# EAGLE board Panel (EAGLE 6.2)
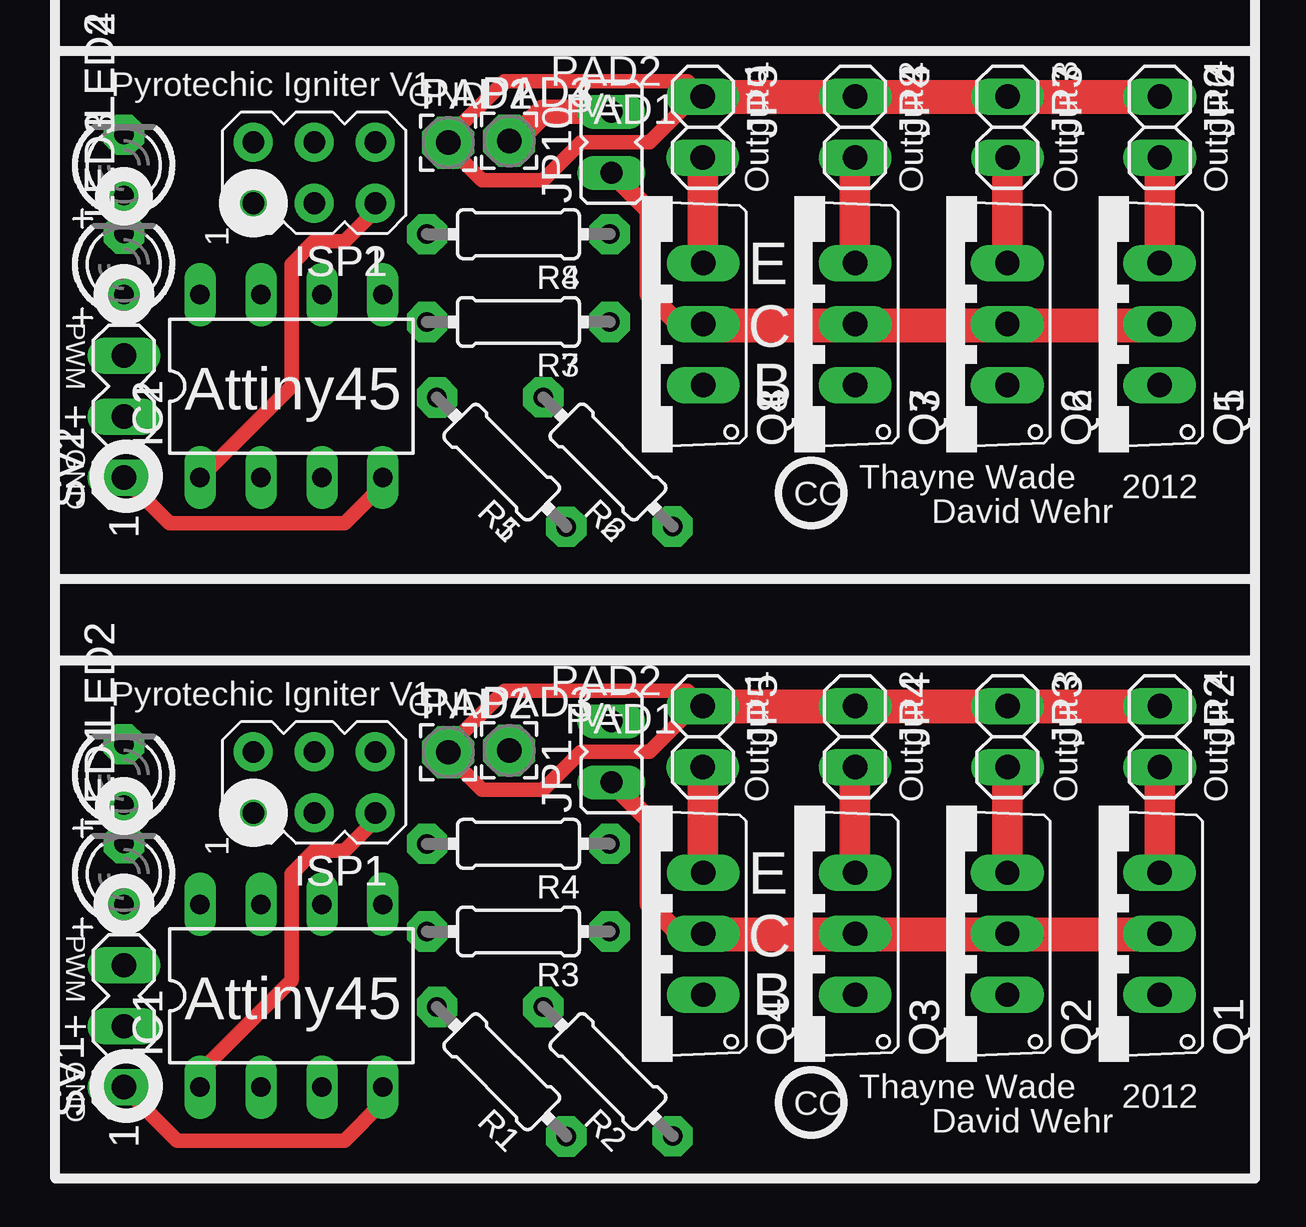
[diagram p0: board, top side]
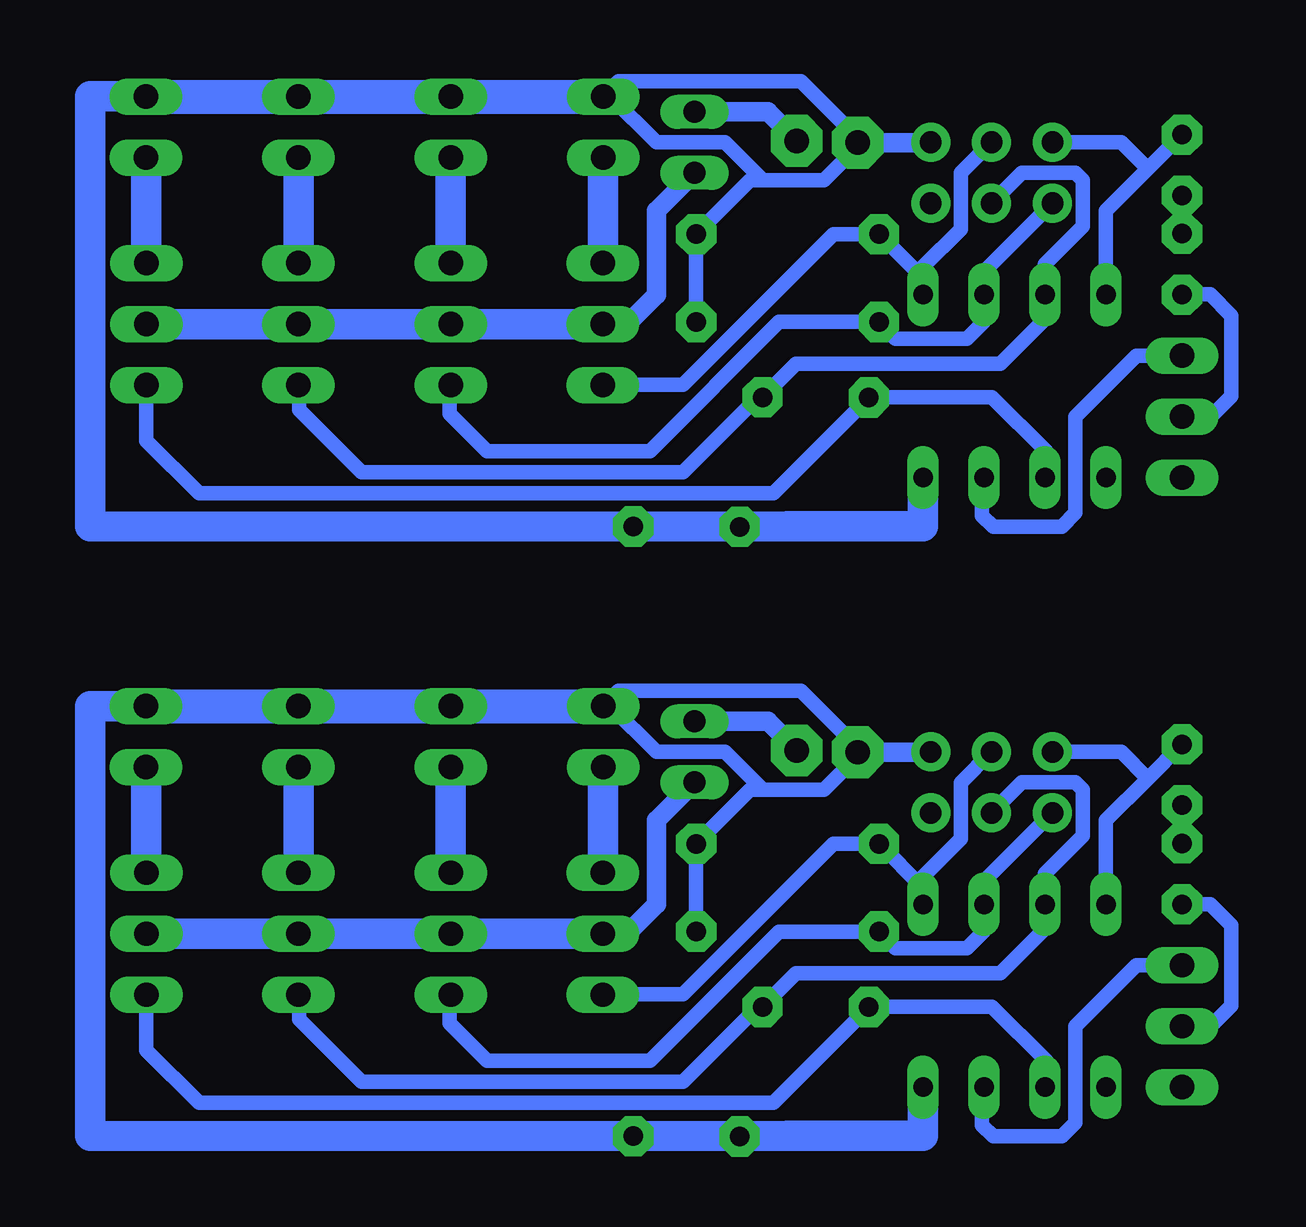
[diagram p1: board, bottom side, seen from below]

No outline drawn. Coordinates in mm, seen from the top.
Copper layers (1*16): Top 0.035mm / dielectric 1.5mm / Bottom 0.035mm
Design rules: minimum track width 10mil, minimum drill 24mil, track to track 8mil, track to pad 8mil, pad to pad 8mil, via to via 8mil, smd to smd 8mil, copper to edge 40mil, drill to drill 8mil, minimum pad ring 10mil, minimum via ring 8mil, stop-mask expansion 4mil, vias tented up to drill 0mil, thermal gap 10mil

## Footprints (pad centres in the part's own frame; a part is rotated, then mirrored left to right if it is on the bottom)
DIL08 = drill 0.813 long: 1 -3.81,-3.81; 2 -1.27,-3.81; 3 1.27,-3.81; 4 3.81,-3.81; 5 3.81,3.81; 6 1.27,3.81; 7 -1.27,3.81; 8 -3.81,3.81
AVRISP = drill 0.9 pad 1.626: 1 -1.27,2.54; 2 1.27,2.54; 3 -1.27,0; 4 1.27,0; 5 -1.27,-2.54; 6 1.27,-2.54
JP1 = drill 0.914 long: 1 0,-1.27; 2 0,1.27
1X02 = drill 1.016 long: 1 -1.27,0; 2 1.27,0
LED3MM = drill 0.813 pad 1.676 octagon: A -1.27,0; K 1.27,0
2,15/1,0 = drill 1.016 pad 2.159 octagon: 1 0,0
TO220V = drill 1.016 long: 1 -2.54,-2.54; 2 0,-2.54; 3 2.54,-2.54
0204/7 = drill 0.813 pad 1.676 octagon: 1 -3.81,0; 2 3.81,0
MA03-1 = drill 1.016 long: 1 -2.54,0; 2 0,0; 3 2.54,0

## Placement (x,y rotation side)
IC1  TINY85  [DIL08]  9.84,7.62 0 top
IC2  TINY85  [DIL08]  9.84,33.02 0 top
ISP1  AVRISP-6  [AVRISP]  10.79,16.51 90 top
ISP2  AVRISP-6  [AVRISP]  10.79,41.91 90 top
JP1  [JP1]  23.18,17.78 0 top
JP2  [1X02]  46.04,18.41 270 top
JP3  [1X02]  39.69,18.41 270 top
JP4  [1X02]  33.34,18.41 270 top
JP5  [1X02]  26.99,18.41 270 top
JP6  [1X02]  46.04,43.81 270 top
JP7  [1X02]  39.69,43.81 270 top
JP8  [1X02]  33.34,43.81 270 top
JP9  [1X02]  26.99,43.81 270 top
JP10  [JP1]  23.18,43.18 0 top
LED1  [LED3MM]  2.86,12.7 90 top
LED2  [LED3MM]  2.86,16.83 90 top
LED3  [LED3MM]  2.86,38.1 90 top
LED4  [LED3MM]  2.86,42.23 90 top
PAD1  - Flight Pack  [2,15/1,0]  16.38,43.17 0 top
PAD2  - Flight Pack  [2,15/1,0]  16.38,17.77 0 top
PAD3  + Flight Pack  [2,15/1,0]  18.92,17.84 0 top
PAD4  + Flight Pack  [2,15/1,0]  18.92,43.24 0 top
Q1  [TO220V]  43.49,10.2 90 top
Q2  [TO220V]  37.14,10.2 90 top
Q3  [TO220V]  30.8,10.2 90 top
Q4  [TO220V]  24.46,10.2 90 top
Q5  [TO220V]  43.49,35.6 90 top
Q6  [TO220V]  37.14,35.6 90 top
Q7  [TO220V]  30.8,35.6 90 top
Q8  [TO220V]  24.46,35.6 90 top
R1  1M  [0204/7]  18.61,4.45 135 top
R2  1M  [0204/7]  23.04,4.46 135 top
R3  1M  [0204/7]  19.3,10.3 180 top
R4  1M  [0204/7]  19.3,13.95 180 top
R5  1M  [0204/7]  18.61,29.85 135 top
R6  1M  [0204/7]  23.04,29.86 135 top
R7  1M  [0204/7]  19.3,35.7 180 top
R8  1M  [0204/7]  19.3,39.35 180 top
SV1  [MA03-1]  2.86,6.35 90 top
SV2  [MA03-1]  2.86,31.75 90 top

## Library data of the parts
IC1 IC2 = atmel; OC_FARNELL: unknown; OC_NEWARK: unknown
ISP1 ISP2 LED1-LED4 Q1-Q8 R1-R8 = adafruit
JP1 JP10 = jumper
JP2-JP9 = pinhead
PAD1-PAD4 = wirepad
SV1 SV2 = con-lstb; OC_FARNELL: unknown; OC_NEWARK: unknown

## Nets
+5V: IC1.8 ISP1.2 LED2.K
+5V1: IC2.8 ISP2.2 LED4.K
FP: JP1.1 Q1.2 Q2.2 Q3.2 Q4.2
FP1: JP10.1 Q5.2 Q6.2 Q7.2 Q8.2
GND: IC1.4 ISP1.6 JP2.1 JP3.1 JP4.1 JP5.1 PAD2.1 R1.1 R2.1 R3.1 R4.1 SV1.1
GND1: IC2.4 ISP2.6 JP6.1 JP7.1 JP8.1 JP9.1 PAD1.1 R5.1 R6.1 R7.1 R8.1 SV2.1
N$1: IC1.7 ISP1.3 Q2.1 R2.2
N$2: IC1.6 ISP1.1 Q3.1 R3.2
N$3: JP1.2 PAD3.1
N$4: IC1.1 ISP1.5
N$5: IC1.3 SV1.3
N$6: LED1.A SV1.2
N$7: LED1.K LED2.A
N$8: IC1.2 Q1.1 R1.2
N$9: JP2.2 Q1.3
N$10: JP3.2 Q2.3
N$11: JP4.2 Q3.3
N$12: JP5.2 Q4.3
N$14: IC2.7 ISP2.3 Q6.1 R6.2
N$15: IC2.6 ISP2.1 Q7.1 R7.2
N$16: IC1.5 ISP1.4 Q4.1 R4.2
N$17: IC2.1 ISP2.5
N$18: IC2.3 SV2.3
N$19: IC2.2 Q5.1 R5.2
N$20: JP6.2 Q5.3
N$21: JP7.2 Q6.3
N$22: JP8.2 Q7.3
N$23: JP9.2 Q8.3
N$24: LED3.A SV2.2
N$25: LED3.K LED4.A
N$26: IC2.5 ISP2.4 Q8.1 R8.2
N$27: JP10.2 PAD4.1

## Tracks (layer width: path | path; a pad name or v marks a point on that pad's centre or on a via)
+5V
  Bottom 0.61: LED2.K 4.29,16.67 | 4.29,16.67 6.03,14.92 IC1.8 | ISP1.2 5.4,17.78 4.29,16.67
+5V1
  Bottom 0.61: LED4.K 4.29,42.07 | 4.29,42.07 6.03,40.32 IC2.8 | ISP2.2 5.4,43.18 4.29,42.07
FP
  Top 0.813: 26.99,10.16 26.04,10.16 24.77,11.43 24.77,14.92 JP1.1
  Top 1.422: 46.04,10.16 26.99,10.16
  Bottom 0.813: JP1.1 24.77,14.92 24.77,11.43 25.99,10.2 Q4.2
  Bottom 1.27: Q1.2 Q2.2 39.66,10.2 | 39.66,10.2 39.66,10.12 | 39.66,10.2 Q3.2 | Q3.2 | Q3.2 26.96,10.2 | 26.96,10.2 26.96,10.3 | Q4.2 26.96,10.2 | 26.96,10.2
FP1
  Top 0.813: 26.99,35.56 26.04,35.56 24.77,36.83 24.77,40.32 JP10.1
  Top 1.422: 26.99,35.56 46.67,35.56
  Bottom 0.813: JP10.1 24.77,40.32 24.77,36.83 25.99,35.6 Q8.2
  Bottom 1.27: Q5.2 Q6.2 39.66,35.6 | 39.66,35.6 39.66,35.52 | 39.66,35.6 Q7.2 | Q7.2 | Q7.2 26.96,35.6 | 26.96,35.6 26.96,35.7 | Q8.2 26.96,35.6 | 26.96,35.6
GND
  Top 0.61: SV1.1 5.08,1.59 12.06,1.59 13.65,3.17 IC1.4 | PAD2.1 16.38,17.6 17.78,16.19 20.32,16.19 21.91,17.78 24.77,17.78 26.67,19.68 JP5.1 26.35,20.32 18.73,20.32 16.19,17.78
  Top 1.422: JP5.1 46.67,19.68
  Bottom 0.61: R3.1 R4.1 20.87,16.19 20.32,16.19 | 20.32,16.19 17.78,16.19 16.38,17.6 PAD2.1 | 16.19,17.78 18.73,20.32 26.35,20.32 JP5.1 26.67,19.68 24.77,17.78 21.91,17.78 20.32,16.19
  Bottom 0.813: ISP1.6 13.35,17.77 PAD2.1
  Bottom 1.27: 19.3,1.79 R2.1 48.36,1.79 48.36,19.69 JP2.1 | 19.3,1.79 13.65,1.79 IC1.4 | R1.1 19.3,1.79 | 19.3,1.79
  Bottom 1.422: JP2.1 JP3.1 JP4.1 JP5.1
GND1
  Top 0.61: SV2.1 4.76,27.3 12.06,27.3 13.65,28.89 IC2.4 | PAD1.1 16.38,43 17.78,41.59 20.32,41.59 21.91,43.18 24.77,43.18 26.67,45.09 JP9.1 26.35,45.72 18.73,45.72 16.19,43.18
  Top 1.422: JP9.1 46.67,45.09
  Bottom 0.61: R7.1 R8.1 20.87,41.59 20.32,41.59 | 20.32,41.59 17.78,41.59 16.38,43 PAD1.1 | 16.19,43.18 18.73,45.72 26.35,45.72 JP9.1 26.67,45.09 24.77,43.18 21.91,43.18 20.32,41.59
  Bottom 0.813: ISP2.6 13.35,43.17 PAD1.1
  Bottom 1.27: 19.3,27.19 R6.1 48.36,27.19 48.36,45.09 JP6.1 | 19.3,27.19 13.65,27.19 IC2.4 | R5.1 19.3,27.19 | 19.3,27.19
  Bottom 1.422: JP6.1 JP7.1 JP8.1 JP9.1
N$1
  Bottom 0.61: ISP1.3 9.53,16.51 7.3,16.51 6.99,16.19 6.99,14.29 8.57,12.7 IC1.7 8.57,10.41 10.43,8.56 18.94,8.56 R2.2 20.53,7.16 23.65,4.03 37.05,4.03 39.66,6.64 39.66,7.64 Q2.1
N$2
  Bottom 0.61: ISP1.1 11.11,12.38 IC1.6 11.11,10.31 11.82,9.6 14.8,9.6 R3.2 19.65,10.3 25.04,4.9 31.83,4.9 33.4,6.47 33.4,7.61 Q3.1
N$3
  Bottom 0.813: JP1.2 20.13,19.05 PAD3.1
N$4
  Top 0.61: IC1.1 6.03,4.45 9.84,8.26 9.84,12.7 10.79,13.65 12.06,13.65 13.34,14.92 ISP1.5
N$5
  Bottom 0.61: SV1.3 4.76,8.89 7.3,6.35 7.3,2.33 7.88,1.76 10.73,1.76 11.19,2.23 11.19,3.73 IC1.3
N$6
  Bottom 0.61: SV1.2 1.66,6.35 0.8,7.2 0.8,10.56 1.69,11.44 LED1.A
N$7
  Bottom 0.61: LED1.K LED2.A
N$8
  Bottom 0.61: IC1.2 8.51,3.87 8.51,4.9 10.78,7.16 16,7.16 15.98,7.15 R1.2 19.89,3.16 43.83,3.16 46.03,5.35 Q1.1
N$9
  Top 1.27: JP2.2 46.04,12.7
  Bottom 1.27: Q1.3 JP2.2
N$10
  Top 1.27: JP3.2 39.69,12.7
  Bottom 1.27: Q2.3 JP3.2
N$11
  Top 1.27: JP4.2 33.34,12.7
  Bottom 1.27: Q3.3 JP4.2
N$12
  Top 1.27: JP5.2 26.99,12.7
  Bottom 1.27: Q4.3 26.99,12.74 JP5.2
N$14
  Bottom 0.61: ISP2.3 9.53,41.91 7.3,41.91 6.99,41.59 6.99,39.69 8.57,38.1 IC2.7 8.57,35.81 10.43,33.96 18.94,33.96 R6.2 20.53,32.55 23.65,29.43 37.05,29.43 39.66,32.04 39.66,33.04 Q6.1
N$15
  Bottom 0.61: ISP2.1 11.11,37.78 IC2.6 11.11,35.71 11.82,35 14.8,35 R7.2 19.65,35.7 25.04,30.3 31.83,30.3 33.4,31.87 33.4,33.01 Q7.1
N$16
  Bottom 0.61: ISP1.4 12.07,16.5 12.07,14.16 13.65,12.58 IC1.5 13.65,12.13 15.47,13.95 R4.2 17.39,13.95 23.65,7.69 26.98,7.69 Q4.1
N$17
  Top 0.61: IC2.1 9.84,33.02 9.84,38.1 10.79,39.05 12.06,39.05 13.34,40.32 ISP2.5
N$18
  Bottom 0.61: SV2.3 4.76,34.29 7.3,31.75 7.3,27.73 7.88,27.16 10.73,27.16 11.19,27.63 11.19,29.13 IC2.3
N$19
  Bottom 0.61: IC2.2 8.51,29.27 8.51,30.3 10.78,32.56 16,32.56 15.98,32.55 R5.2 19.89,28.56 43.83,28.56 46.03,30.75 Q5.1
N$20
  Top 1.27: JP6.2 46.04,38.1
  Bottom 1.27: Q5.3 JP6.2
N$21
  Top 1.27: JP7.2 39.69,38.1
  Bottom 1.27: Q6.3 JP7.2
N$22
  Top 1.27: JP8.2 33.34,38.1
  Bottom 1.27: Q7.3 JP8.2
N$23
  Top 1.27: 26.99,38.1 JP9.2
  Bottom 1.27: Q8.3 26.99,38.14 JP9.2
N$24
  Bottom 0.61: SV2.2 1.66,31.75 0.8,32.6 0.8,35.96 1.69,36.84 LED3.A
N$25
  Bottom 0.61: LED3.K LED4.A
N$26
  Bottom 0.61: ISP2.4 12.07,41.9 12.07,39.56 13.65,37.98 IC2.5 13.65,37.53 15.47,39.35 R8.2 17.39,39.35 23.65,33.09 26.98,33.09 Q8.1
N$27
  Top 1.016: 19.05,43.18 20.32,44.45 JP10.2
  Bottom 0.813: JP10.2 20.13,44.45 PAD4.1

## Text on the board
tPlace: Pyrotechic Igniter V1 | GND | V+ | Output 1 | Output 2 | Output 3 | Output 4 | E | PWM | C | Attiny45 | B | + | GND | Thayne Wade | CC | 2012 | David Wehr | Pyrotechic Igniter V1 | GND | V+ | Output 1 | Output 2 | Output 3 | Output 4 | E | PWM | C | Attiny45 | B | + | GND | CC | Thayne Wade | 2012 | David Wehr
_tNames: PAD2 | JP5 | JP5 | JP4 | JP4 | JP3 | JP3 | JP2 | JP2 | PAD2 | PAD3 | LED2 | LED2 | PAD1 | JP1 | LED1 | LED1 | ISP1 | ISP1 | R4 | R4 | R3 | R3 | Q4 | Q4 | Q3 | Q3 | Q2 | Q2 | Q1 | Q1 | IC1 | IC1 | SV1 | SV1 | R1 | R1 | R2 | R2 | JP5 | JP5 | JP4 | JP4 | JP3 | JP3 | JP2 | JP2 | PAD2 | LED2 | PAD2 | PAD3 | PAD1 | LED1 | LED1 | JP1 | ISP1 | ISP1 | R4 | R4 | R3 | R3 | IC1 | IC1 | Q4 | Q4 | Q3 | Q3 | Q2 | Q2 | Q1 | Q1 | SV1 | SV1 | R1 | R1 | R2 | R2